# Altium PCB PCB1.PcbDoc
Units mil, origin at the board's own origin, x right, y up, seen from the top; angles counter-clockwise.
Board outline 944.88 x 748.03 mil, 2 copper layers (Top Layer, Bottom Layer), stack 40.158 mil thick; 10 components, 6 nets, 34 pads, 0 vias.
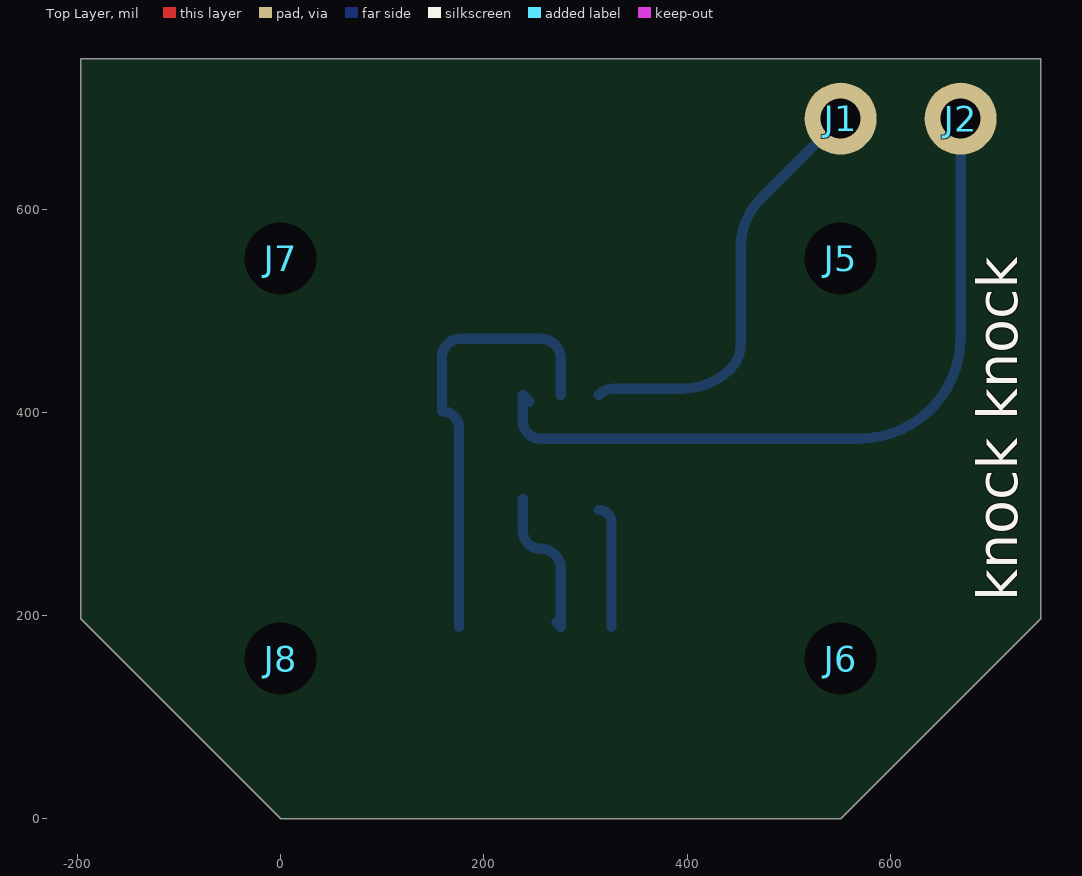
[diagram p0: Top Layer view]
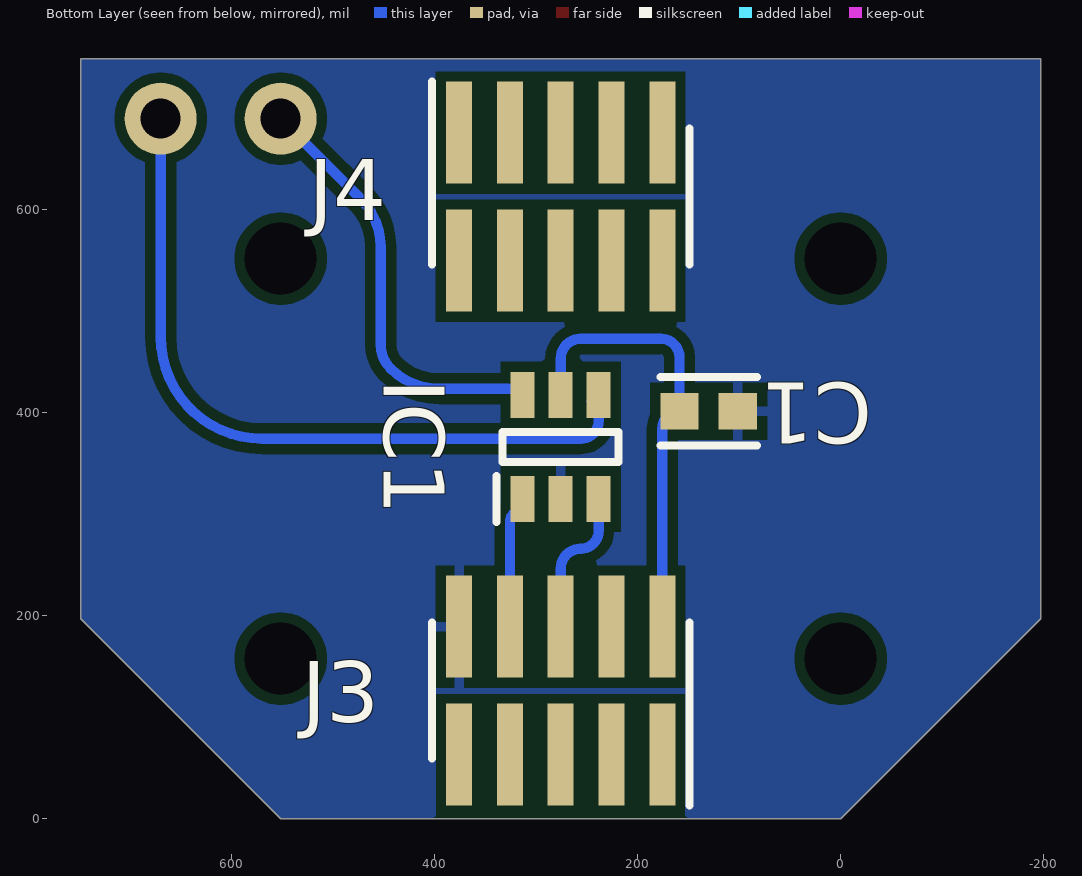
[diagram p1: Bottom Layer view, seen from below]
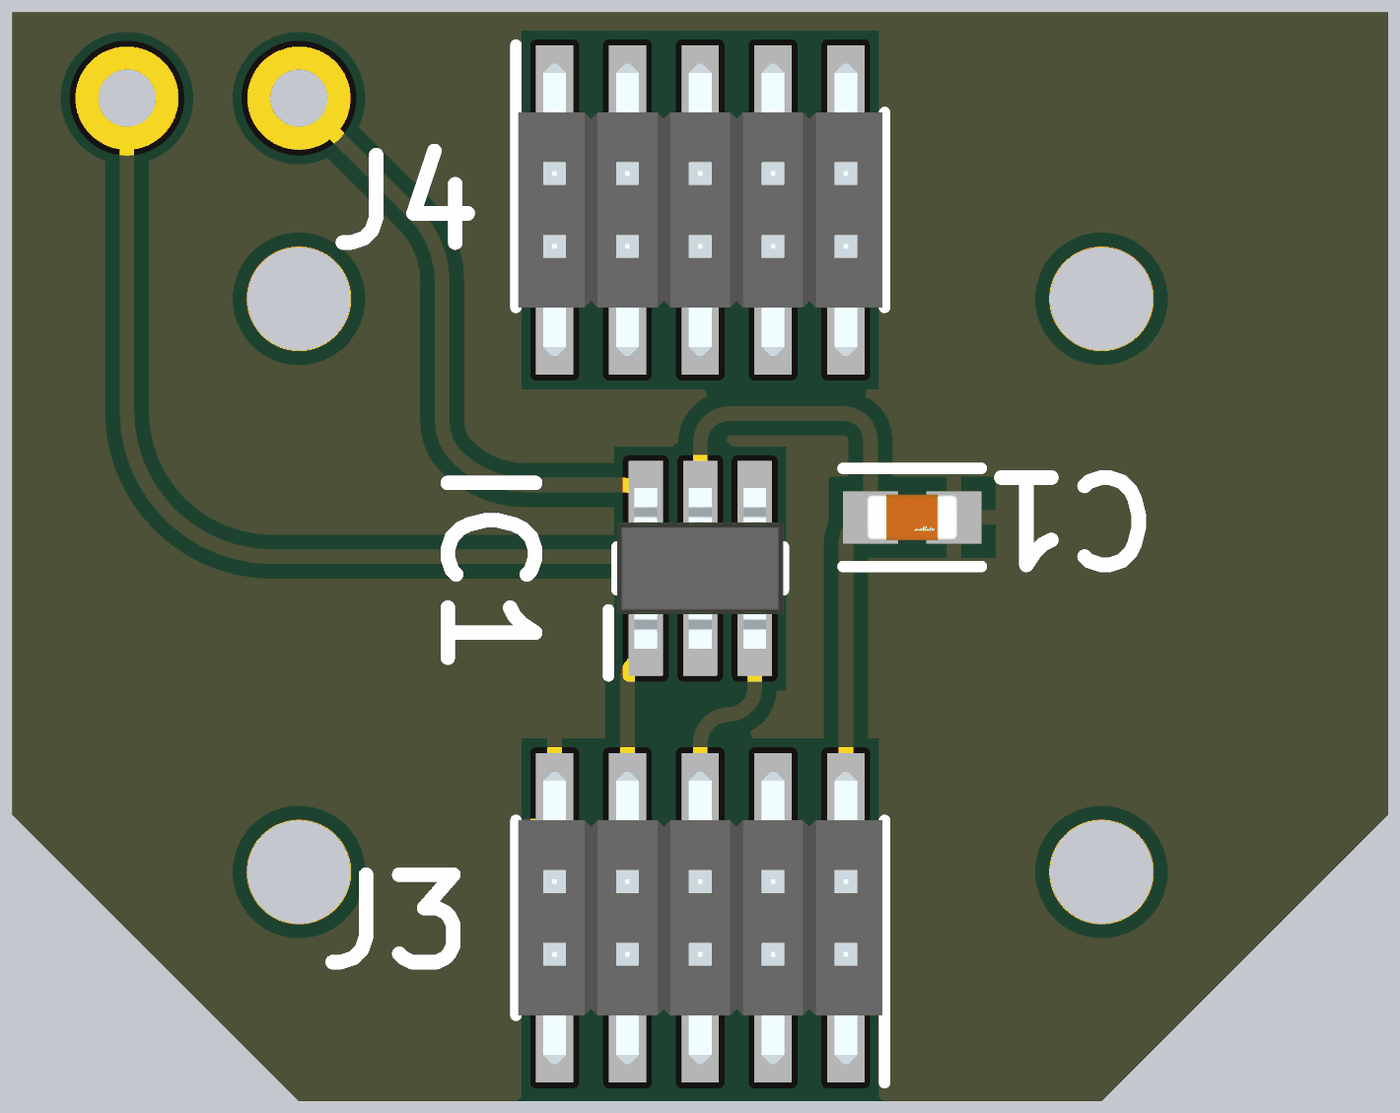
[diagram p2: 3D render of the assembled board from below, using the file's embedded part models]

## Layer stack, top to bottom
Top Solder: solder mask 0.4, Solder Resist, Dk 3.5
Top Layer: signal copper 0.3937
Dielectric 1: dielectric 39.3701, FR-4, Dk 4.8
Bottom Layer: signal copper 0.3937
Bottom Solder: solder mask 0.4, Solder Resist, Dk 3.5

## Board outline
-196.85,196.85 0,0 551.18,0 748.03,196.85 748.03,748.03 -196.85,748.03

## Design rules (kind name [scope] priority, off if disabled: settings)
Clearance [All] p1: gap=6 ignorepadtopadclearanceinfootprint=FALSE except(0: Arc-Hole Track-Hole SMDPad-Hole THPad-Hole Via-Hole Fill-Hole Poly-Hole Region-Hole Text-Hole)
MinimumSolderMaskSliver [All] p1: minsoldermaskwidth=5
PlaneClearance [All] p1: clearance=10
PlaneConnect [All] p1: planeconnectstyle=Relief reliefexpansion=10 reliefentries=4 reliefconductorwidth=10 reliefairgap=10
PolygonConnect [All] p1: thpad.connectstyle=Relief thpad.reliefconductorwidth=10 thpad.reliefentries=4 thpad.polygonreliefangle="90 Angle" thpad.airgapwidth=10 smdpad.connectstyle=Relief smdpad.reliefconductorwidth=10 smdpad.reliefentries=4 smdpad.polygonreliefangle="90 Angle" smdpad.airgapwidth=10 via.connectstyle=Direct via.reliefconductorwidth=10 via.reliefentries=4 via.polygonreliefangle="90 Angle" via.airgapwidth=10
RoutingVias [All] p1: holewidth=12 width=20 viastyle="Through Hole" minholewidth=10 minwidth=20 maxholewidth=28 maxwidth=50
SilkToSilkClearance [All] p1: silktosilkclearance=6
SilkToSolderMaskClearance [IsPad] p1: minsilkscreentomaskgap=5 clearancetoexposedcopper=TRUE
SolderMaskExpansion [All] p1: expansion=4 istentingtop=FALSE
UnRoutedNet [All] p1: checkbadconnections=TRUE
Width [All] p1: maxlimit=10 minlimit=10 preferedwidth=10
24 further rules are at their usual default settings.

## Components (designator, comment, footprint, x,y, rotation, side; value= is the part's Value field where it differs from the comment)
C1 "0.1uF" FP-GCM188-0_1-IPC_B 130.03,401.03 r180 bottom
IC1 "MP6513GJ-Z" SOT95P280X100-6N 275.59,366.03 r90 bottom
J1 "single_pin" 1mm_single_pin_thr#1 566.93,669.29 r0 top
J2 "single_pin" 1mm_single_pin_thr#2 677.17,665.35 r0 top
J3 "GRPB052VWQS-RC" HUSSP10W40P127_2X5_635X340X400P 275.59,125.98 r0 bottom
J4 "GRPB052VWQS-RC" HUSSP10W40P127_2X5_635X340X400P 275.59,612.2 r180 bottom
J5 "M1.6_mount_hole" M1.6_mount_hole 551.18,551.18 r0 top
J6 "M1.6_mount_hole" M1.6_mount_hole 551.18,157.48 r0 top
J7 "M1.6_mount_hole" M1.6_mount_hole 0,551.18 r0 top
J8 "M1.6_mount_hole" M1.6_mount_hole 0,157.48 r0 top

## Footprints (in the part's own frame and the unit in brackets; to place one, negate y for a bottom-side part, rotate by r counter-clockwise, add the part's x,y. Pads: shape width x height; smd on the part's side, far side on the other; paste and mask are expansions set on the pad)
1mm_single_pin_thr#1 [mm] "1mm_single_pin_through_hole"
  round 1.8 hole 1: 1(-0.4,0.5)
1mm_single_pin_thr#2 [mm] "1mm_single_pin_through_hole"
  round 1.8 hole 1: 1(-0.2,0.6)
FP-GCM188-0_1-IPC_B [mil]
  rect 37.74x35.91 smd paste+0 mask+0: 1(-28.61,0) 2(28.61,0)
  silkscreen extent -47,-34 47,34, body extent -31,-16 31,16, height 35
HUSSP10W40P127_2X5_635X340X400P [mm]
  rect 0.65x2.55 smd: 1(-2.54,1.6) 2(-2.54,-1.6) 3(-1.27,1.6) 4(-1.27,-1.6) 5(0,1.6) 6(0,-1.6) 7(1.27,1.6) 8(1.27,-1.6) 9(2.54,1.6) 10(2.54,-1.6)
  silkscreen extent -3.21,-1.7 3.21,2.88, body extent -3.17,-2.55 3.17,2.55, height 5
M1.6_mount_hole [mm] "M1.6_mount_hole"
  round 1 hole 1.8: 1(0,0)
SOT95P280X100-6N [mm]
  rect 1.15x0.6 smd: 1(-1.3,0.95) 2(-1.3,0) 3(-1.3,-0.95) 4(1.3,-0.95) 5(1.3,0) 6(1.3,0.95)
  silkscreen extent -1.88,-1.45 0.38,1.6, body extent -1.4,-1.45 1.4,1.45, height 1

## Part data
C1: library part CMP-2006-02353-3, "Ceramic Capacitor for Automotive 100nF  ±10% 50VDC X8L 0603 Paper T/R", Capacitance=100nF, Case Code (Imperial)=0603, Case Code (Metric)=1608, Dielectric=X8L, Max Operating Temperature=150°C, Min Operating Temperature=-55°C, Package Quantity=4000, Ratings=AEC-Q200, Tolerance=10%, Voltage=50V, Case/Package=0603, Depth=0.8mm, Height=0.8mm, Lead Free="Lead Free", Length=1.6mm, Mount="Surface Mount", Packaging="Tape and Reel", Radiation Hardening=No, Termination=SMD/SMT, Thickness=0.035inch, Voltage Rating=50V, Voltage Rating (DC)=50V, Width=0.5mm
IC1: "Integrated Circuit", Manufacturer_Name="Monolithic Power Systems (MPS)", Mouser Part Number=946-MP6513GJ-Z, Datasheet Link=https://www.mouser.com/datasheet/2/277/MP6513_r1.0-1384349.pdf, Height=1mm, Manufacturer_Part_Number=MP6513GJ-Z, Mouser Price/Stock=https://www.mouser.co.uk/ProductDetail/Monolithic-Power-Systems-MPS/MP6513GJ-Z?qs=FfNbArp%252BdljFzTtslD%252B1UQ%3D%3D
J1 J2: "single pin header"
J3 J4: "Connector", Manufacturer_Name=Sullins, Datasheet Link=http://www.sullinscorp.com/catalogs/82_PAGE90-91_.050_MALE_HDR_ST_RA_SMT.pdf, Manufacturer_Part_Number=GRPB052VWQS-RC

## Nets (pads, with @x,y where several pads share a name; then routed paths per layer and width w, separated by ;. In a path a pad name is that pad's centre, name@x,y a point inside that pad or via, vN(x,y) a via of type N, cw(c..) or ccw(c..) an arc to the next point about the centre after c; other vN are vias at no path point)
+3.3V: C1.1 IC1.5 J3.2 | length 448.9
  Bottom Layer w10: J3.2 175.59,384.08 ccw(c158.64,384.08) C1.1 158.64,453.92 cw(c177.17,453.92) 177.17,472.44 255.91,472.44 cw(c255.91,452.76) 275.59,452.76 IC1.5
GND: C1.2 IC1.2 J3.10
IN1: IC1.3 J3.6 | length 153.2
  Bottom Layer w10: IC1.3 238.19,283.46 ccw(c255.91,283.46) 255.91,265.75 cw(c255.91,246.06) 275.59,246.06 J3.6 J3.6@271.37,193.2
IN2: IC1.1 J3.8 | length 122.2
  Bottom Layer w10: IC1.1@312.99,304.02 cw(c312.99,291.43) 325.59,291.43 J3.8
OUT1: IC1.6 J1.1 | length 423.4
  Bottom Layer w10: IC1.6 cw(c327.52,402.69) 327.52,423.23 395.39,423.23 ccw(c395.39,490.44) 442.91,442.91 ccw(c419.15,466.68) 452.76,466.68 452.76,562.71 cw(c519.96,562.71) 472.44,610.24 J1.1
OUT2: IC1.4 J2.1 | length 748.4
  Bottom Layer w10: IC1.4@245,410.4 IC1.4 238.19,391.73 ccw(c255.91,391.73) 255.91,374.02 569.29,374.02 ccw(c569.29,474.02) 669.29,474.02 J2.1
pads on no net: J3.1 J3.3 J3.4 J3.5 J3.7 J3.9 J4.1 J4.2 J4.3 J4.4 J4.5 J4.6 J4.7 J4.8 J4.9 J4.10 J5.1 J6.1 J7.1 J8.1

## Polygon pours and split planes (outlines as drawn)
GND on Bottom Layer "GND_L02_P000" (solid, pour order 0): -196.85,748.03 748.03,748.03 748.03,196.85 551.18,0 0,0 -196.85,196.85

## Silkscreen, mask and mechanical layers (free items; w line width, h text height)
Top Overlay:
  text "knock knock" at 725,214 h40 r90
Mechanical 1:
  the board outline again, w10